# Altium PCB PCBDaughterBoard.PcbDoc
Units mm, origin at the board's own origin, x right, y up, seen from the top; angles counter-clockwise.
Board outline 50 x 65 mm, 2 copper layers (Top Layer, Bottom Layer); 12 components, 10 nets, 78 pads, 0 vias.
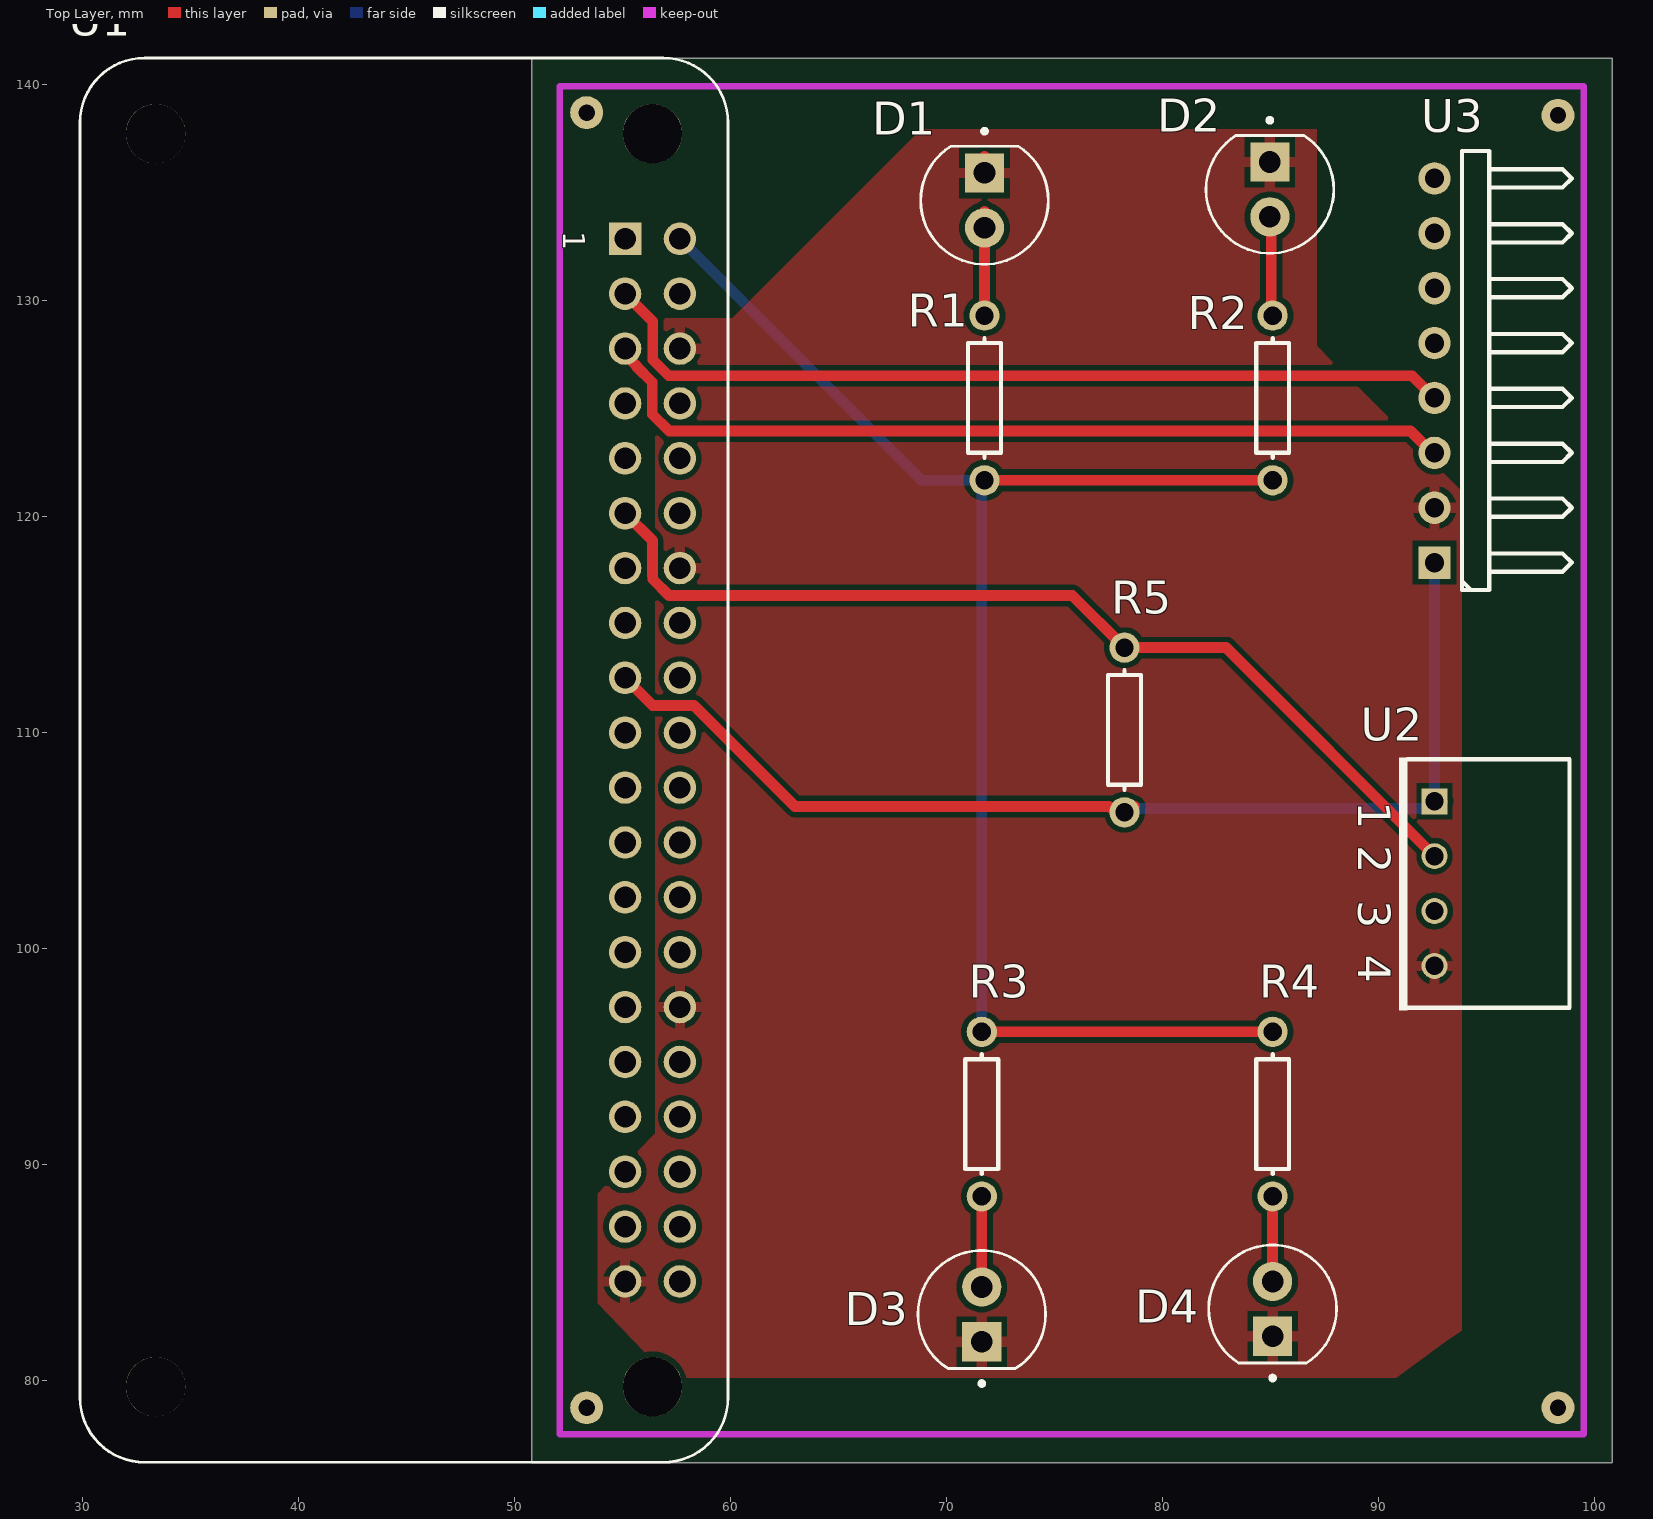
[diagram p0: Top Layer view]
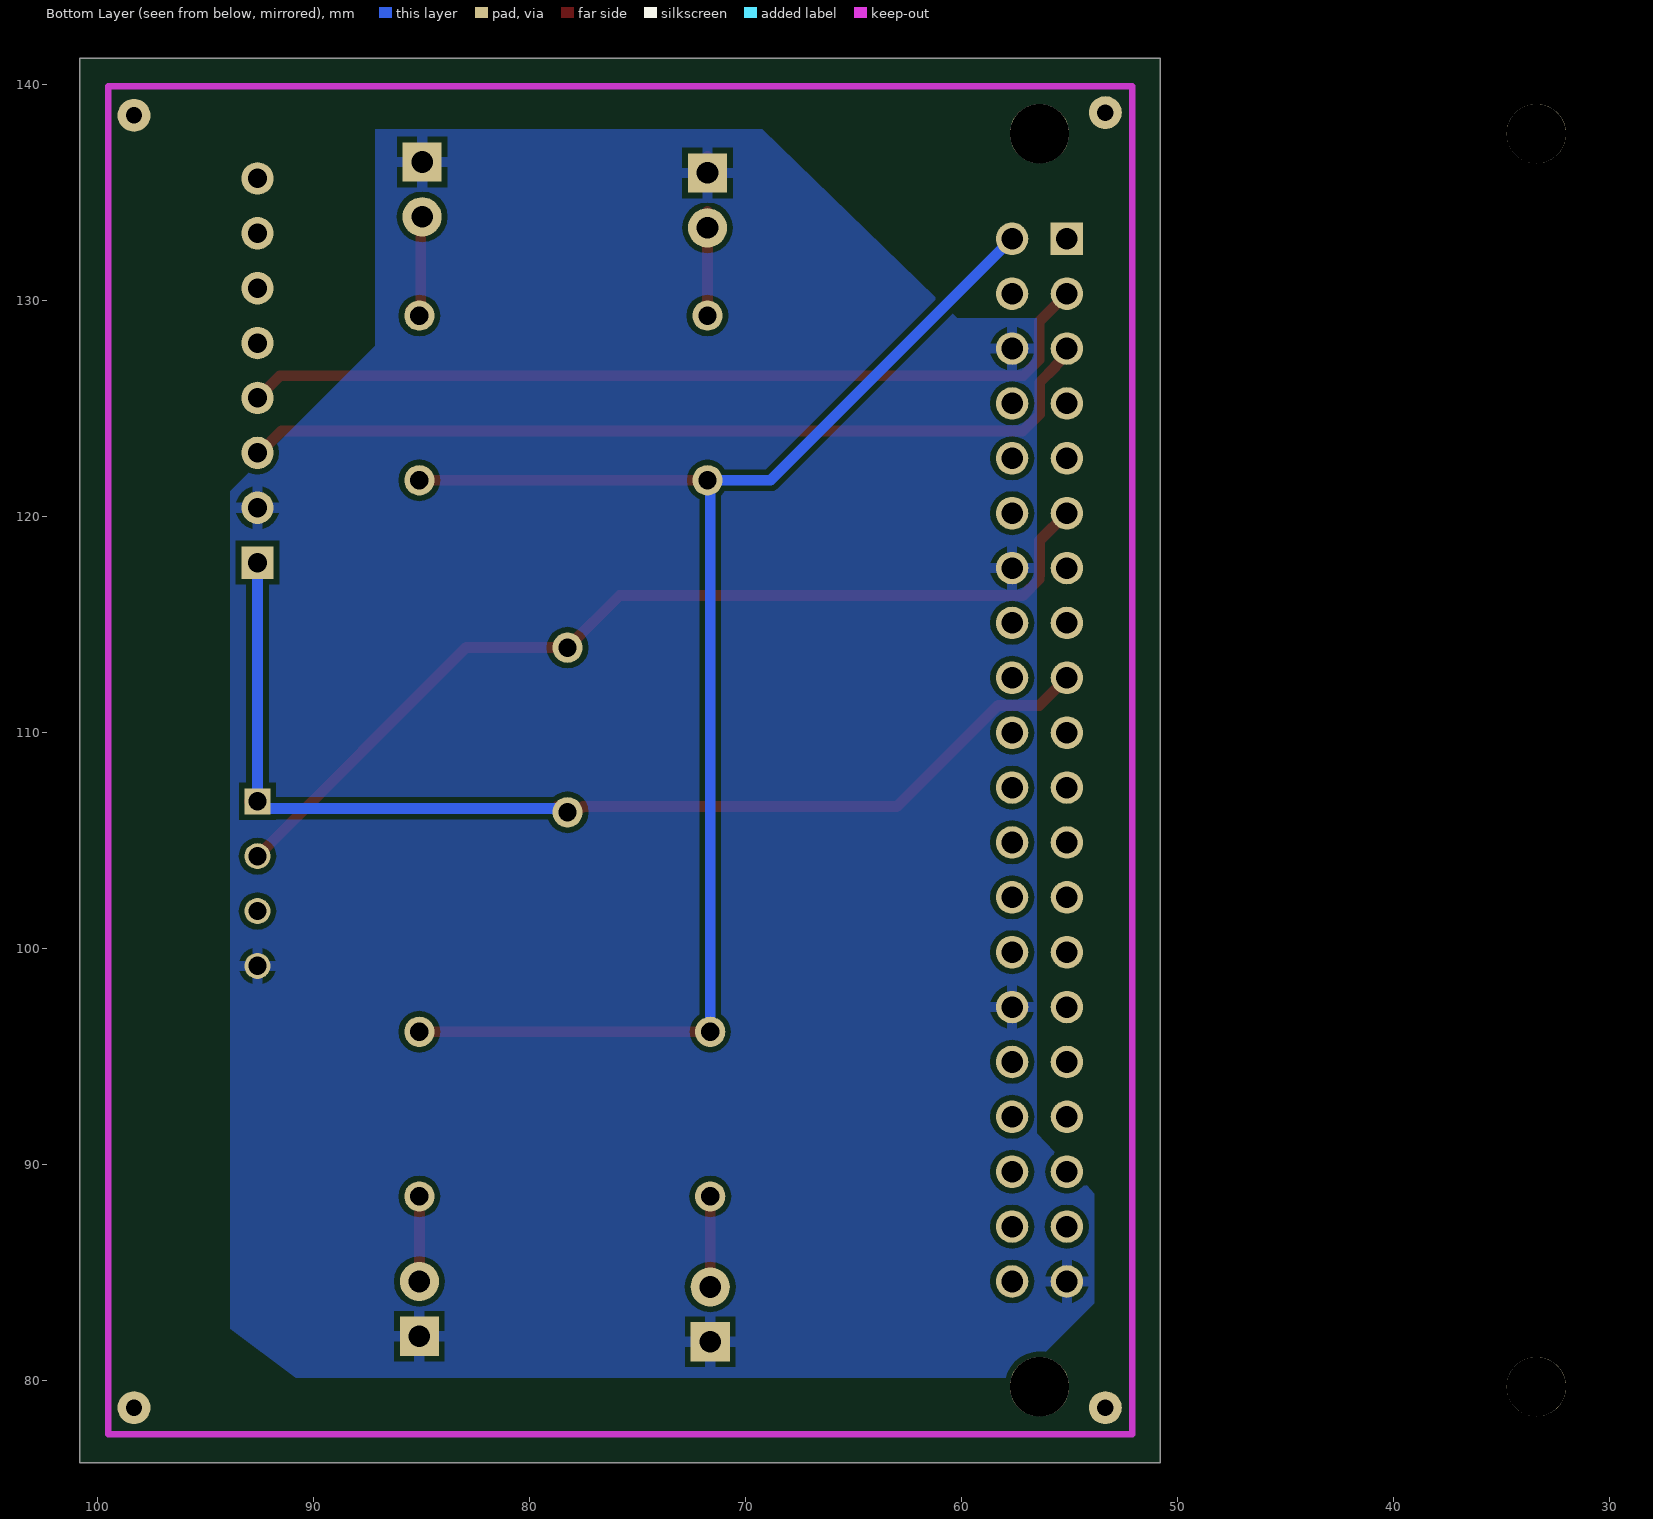
[diagram p1: Bottom Layer view, seen from below]

## Layer stack, top to bottom
Top Solder: solder mask 0.0102, Solder Resist, Dk 3.5
Top Layer: signal copper 0.0356
Dielectric 1: dielectric 0.32, FR-4, Dk 4.8
Bottom Layer: signal copper 0.0356
Bottom Solder: solder mask 0.0102, Solder Resist, Dk 3.5

## Board outline
50.8,76.2 100.8,76.2 100.8,141.2 50.8,141.2

## Design rules (kind name [scope] priority, off if disabled: settings)
Clearance [All] p1: gap=0.254 ignorepadtopadclearanceinfootprint=FALSE except(0: Arc-Hole Track-Hole SMDPad-Hole THPad-Hole Via-Hole Fill-Hole Poly-Hole Region-Hole Text-Hole)
HoleSize [All] p1: absolutevalues=TRUE maxlimit=6.3 minlimit=0.025 maxpercent=80.000 minpercent=20.000
PolygonConnect [All] p1: connectstyle=Relief reliefconductorwidth=0.5 reliefentries=4 polygonreliefangle="90 Angle" airgapwidth=0.254
RoutingVias [All] p1: holewidth=0.711 width=1.27 viastyle="Through Hole" minholewidth=0.711 minwidth=1.27 maxholewidth=0.711 maxwidth=1.27
SilkToSolderMaskClearance [IsPad] p1: minsilkscreentomaskgap=0.05 clearancetoexposedcopper=FALSE
SolderMaskExpansion [All] p1: expansion=0.102 istentingtop=FALSE
Width [All] p1: maxlimit=0.6 minlimit=0.254 preferedwidth=0.5
28 further rules are at their usual default settings.

## Components (designator, comment, footprint, x,y, rotation, side; value= is the part's Value field where it differs from the comment)
D1 "LED3" LEDRD254W57D500H1070 71.755,134.62 r270 top
D2 "LED3" LEDRD254W57D500H1070 84.963,135.128 r270 top
D3 "LED2" LEDRD254W57D500H1070 71.628,83.058 r90 top
D4 "LED2" LEDRD254W57D500H1070 85.09,83.312 r90 top
R1 "Res1" AXIAL-0.3 71.755,125.476 r90 top value=300
R2 "Res1" AXIAL-0.3 85.09,125.476 r90 top value=330
R3 "Res2" AXIAL-0.3 71.628,92.329 r270 top value=22
R4 "Res2" AXIAL-0.3 85.09,92.329 r270 top value=22
R5 "Res3" AXIAL-0.3 78.232,110.109 r270 top value=4k7
U1 "Raspberry Pi Zero" ADA3708_RPI-ZERO 56.388,108.712 r270 top
U2 "temperature-humidity sensor" NPSIP4A 92.583,102.997 r270 top
U3 "MPU-6050" HDR1X8H 92.583,117.856 r90 top

## Footprints (in the part's own frame and the unit in brackets; to place one, negate y for a bottom-side part, rotate by r counter-clockwise, add the part's x,y. Pads: shape width x height; smd on the part's side, far side on the other; paste and mask are expansions set on the pad)
ADA3708_RPI-ZERO [mm]
  rect 1.508x1.508 hole 1: 1(-24.13,-1.27)
  round 1.508 hole 1: 2(-24.13,1.27) 3(-21.59,-1.27) 4(-21.59,1.27) 5(-19.05,-1.27) 6(-19.05,1.27) 7(-16.51,-1.27) 8(-16.51,1.27) 9(-13.97,-1.27) 10(-13.97,1.27) 11(-11.43,-1.27) 12(-11.43,1.27) 13(-8.89,-1.27) 14(-8.89,1.27) 15(-6.35,-1.27) 16(-6.35,1.27) 17(-3.81,-1.27) 18(-3.81,1.27) 19(-1.27,-1.27) 20(-1.27,1.27) 21(1.27,-1.27) 22(1.27,1.27) 23(3.81,-1.27) 24(3.81,1.27) 25(6.35,-1.27) 26(6.35,1.27) 27(8.89,-1.27) 28(8.89,1.27) 29(11.43,-1.27) 30(11.43,1.27) 31(13.97,-1.27) 32(13.97,1.27) 33(16.51,-1.27) 34(16.51,1.27) 35(19.05,-1.27) 36(19.05,1.27) 37(21.59,-1.27) 38(21.59,1.27) 39(24.13,-1.27) 40(24.13,1.27)
  round 2.75 hole 2.75 unplated: ""(-29,0) ""(-29,-23) ""(29,0) ""(29,-23)
  silkscreen extent -32.5,-26.5 32.5,3.5
AXIAL-0.3 [mm] "Axial Device, Thru-Hole; 2 Leads; 0.3 in Pin Spacing"
  round 1.4 hole 0.85: 1(-3.81,0) 2(3.81,0)
  silkscreen extent -2.77,-0.76 2.77,0.76
HDR1X8H [mm] "Connector; Header; 8 Position; Right Angle"
  rect 1.5x1.5 hole 0.9: 1(0,0)
  round 1.5 hole 0.9: 2(2.54,0) 3(5.08,0) 4(7.62,0) 5(10.16,0) 6(12.7,0) 7(15.24,0) 8(17.78,0)
  silkscreen extent -1.27,-6.35 19.05,-1.27
LEDRD254W57D500H1070 [mm]
  round 1.815 hole 1: A(1.27,0)
  rect 1.815x1.815 hole 1: C(-1.27,0)
  silkscreen extent -3.3,-2.96 2.96,2.96
NPSIP4A [mm] "SIP; 4 Leads; Body 10 x 11.5 x 7.5 mm (typ); Pitch 2.54 mm"
  rect 1.2x1.2 hole 0.85: 1(-3.81,0)
  round 1.2 hole 0.85: 2(-1.27,0) 3(1.27,0) 4(3.81,0)
  silkscreen extent -5.83,-1.65 5.87,6.25

## Part data
D1 D2: "Typical BLUE SiC LED", DatasheetVersion=16-Apr-2002, LatestRevisionDate=17-Dec-2003, LatestRevisionNote="PCB Footprint replaced.", PackageDescription="SM LED; 2 C-Bend Leads; Body 3.5 x 2.8 x 1.9 mm, inc leads (LxWxH typ)", PackageReference=3.5X2.8X1.9, PackageVersion=16-Apr-2002, Published=8-Jun-2000, Publisher="Altium Limited"
D3 D4: "GREEN LED", LatestRevisionDate=17-Jul-2002, LatestRevisionNote="Re-released for DXP Platform.", PackageDescription="SM LED; 2 Flat Leads", PackageReference=3.2X1.6X1.1, PackageVersion=Feb-2002, Published=8-Jun-2000, Publisher="Altium Limited"
R1 R2: "Resistor", LatestRevisionDate=17-Jul-2002, LatestRevisionNote="Re-released for DXP Platform.", PackageDescription="Axial Device, Thru-Hole; 2 Leads; 0.3 in Pin Spacing", PackageReference=AXIAL-0.3, Published=8-Jun-2000, Publisher="Altium Limited"
R3 R4 R5: library part Res1, "Resistor", LatestRevisionDate=17-Jul-2002, LatestRevisionNote="Re-released for DXP Platform.", PackageDescription="Axial Device, Thru-Hole; 2 Leads; 0.3 in Pin Spacing", PackageReference=AXIAL-0.3, Published=8-Jun-2000, Publisher="Altium Limited"
U2: library part DHT11, "temperature-humidity sensor In out of Vcc, DQ, NC, GND", Manufacturer 1="Adafruit Industries", Manufacturer Part Number 1=386, Max Operating Temperature=50°C, Min Operating Temperature=0°C, Supplier Part Number 1=1528-1228-ND, Accuracy=5%, ComponentLink1Description=https://media.digikey.com/pdf/Data%20Sheets/Adafruit%20PDFs/DHT11_ProdManual.pdf?src-supplier=Digi-Key, ComponentLink1URL=https://media.digikey.com/pdf/Data%20Sheets/Adafruit%20PDFs/DHT11_ProdManual.pdf?src-supplier=Digi-Key, Mount="Chassis Mount", Output Type=Digital, Response Time=1s, RoHS=Yes, Sensor Type=Temperature, Series=-, Stock 1=312, Supplier 1=Digi-Key
U3: "3-axis Gyroscope, 3-axis Accelerometer."

## Free pads (board coordinates)
  round 1.524 hole 0.762 mask+1.016: 2(98.298,78.74) 3(53.34,78.74) 4(53.34,138.684) 5(98.298,138.557)

## Nets (pads, with @x,y where several pads share a name; then routed paths per layer and width w, separated by ;. In a path a pad name is that pad's centre, name@x,y a point inside that pad or via, vN(x,y) a via of type N, cw(c..) or ccw(c..) an arc to the next point about the centre after c; other vN are vias at no path point)
+5: R1.1 R2.1 R3.1 R4.1 U1.2 | length 71.3
  Top Layer w0.5: R1.1@71.583,121.494 R1.1 R2.1@85.069,121.666 ; R3.1 R4.1
  Bottom Layer w0.5: U1.2 68.834,121.666 R1.1 71.628,121.539 R3.1
GND: D1.C D2.C D3.C D4.C U1.6 U1.14 U1.30 U1.39 U2.4 U3.2 | length 1.2
  Top Layer w0.5: U1.14@57.658,117.875 U1.14 U1.14@57.811,117.755 ; D1.C@71.628,136.525 71.755,136.652 D1.C@72.009,136.398 ; D2.C@84.836,136.144 D2.C@84.963,136.017
NetD1_1: D1.A R1.2 | length 4.8
  Top Layer w0.5: R1.2 D1.A@71.755,134.112
NetD2_1: D2.A R2.2 | length 4.7
  Top Layer w0.5: D2.A 85.026,133.794 85.026,129.35 R2.2 ; R2.2@85.407,129.603 R2.2@85.471,129.54
NetD3_1: D3.A R3.2 | length 4.2
  Top Layer w0.5: D3.A R3.2
NetD4_1: D4.A R4.2 | length 3.2
  Top Layer w0.5: D4.A 85.09,87.757
NetR5_1: R5.1 U1.11 U2.2 | length 45.1
  Top Layer w0.5: U1.11 56.388,118.872 56.388,117.267 56.4,117.255 56.4,117.081 57.149,116.332 75.819,116.332 R5.1 82.931,113.919 U2.2
NetU1_3: U1.3 U3.4 | length 40.4
  Top Layer w0.5: U1.3 56.4,129.02 56.4,127.241 57.137,126.504 91.545,126.504 92.319,125.73 U3.4@92.583,125.73
NetU1_5: U1.5 U3.3 | length 40.5
  Top Layer w0.5: U1.5 55.118,127.493 55.646,126.965 55.646,126.929 56.376,126.199 56.376,124.725 57.161,123.94 91.466,123.94 92.47,122.936 U3.3
VCC: R5.2 U1.17 U2.1 U3.1 | length 52.1
  Top Layer w0.5: U1.17 56.4,111.24 58.305,111.24 62.979,106.566 77.51,106.566 77.558,106.518 78.424,106.518 78.473,106.566 R5.2@78.713,106.566 ; U2.1 U2.1@92.964,106.807
  Bottom Layer w0.5: R5.2 78.404,106.471 92.247,106.471 U2.1 U3.1
pads on no net: U1. U1.1 U1.4 U1.7 U1.8 U1.9 U1.10 U1.12 U1.13 U1.15 U1.16 U1.18 U1.19 U1.20 U1.21 U1.22 U1.23 U1.24 U1.25 U1.26 U1.27 U1.28 U1.29 U1.31 U1.32 U1.33 U1.34 U1.35 U1.36 U1.37 U1.38 U1.40 U2.3 U3.5 U3.6 U3.7 U3.8

## Polygon pours and split planes (outlines as drawn)
GND on Bottom Layer "GND_L02_P001" (solid, remove dead copper, pour order 1): 90.805,80.137 93.853,82.405 93.853,121.158 87.122,127.889 87.122,137.922 69.469,137.922 69.215,137.922 60.198,129.159 56.515,129.159 56.515,91.44 53.848,88.646 53.848,83.566 57.277,80.137 90.424,80.137
GND on Top Layer "GND_L01_P002" (solid, pour order 2): 90.805,80.137 93.091,81.788 93.853,82.296 93.853,121.158 87.122,127.889 87.122,137.922 68.834,137.922 60.071,129.159 56.515,129.159 56.515,91.44 53.848,88.646 53.848,83.566 57.15,80.137

## Keep-outs
Keep-Out Layer:
  lines w0.3: 52.1,77.5 52.1,139.9 99.5,139.9 99.5,77.5 52.1,77.5

## Silkscreen, mask and mechanical layers (free items; w line width, h text height)
Drill Drawing:
  text ".LEGEND" at 105.88,81.28 h1.52
  text "Drill Drawing." at 105.88,78.74 h1.52

## Text inside footprints (layer, text, board x,y; h text height)
U1: Top Overlay "1" at 52.256,133.185 h1.02 r270
U2: Top Overlay "1" at 89.063,106.807 h1.5 r270; Top Overlay "2" at 89.063,104.775 h1.5 r270; Top Overlay "3" at 89.063,102.235 h1.5 r270; Top Overlay "4" at 89.063,99.695 h1.5 r270